# Altium PCB Low Power Brushed Motor Controller.PcbDoc
Units mil, origin at the board's own origin, x right, y up, seen from the top; angles counter-clockwise.
Board outline 1850 x 1300 mil, 2 copper layers (Top Layer, Bottom Layer); 31 components, 15 nets, 69 pads, 85 vias.
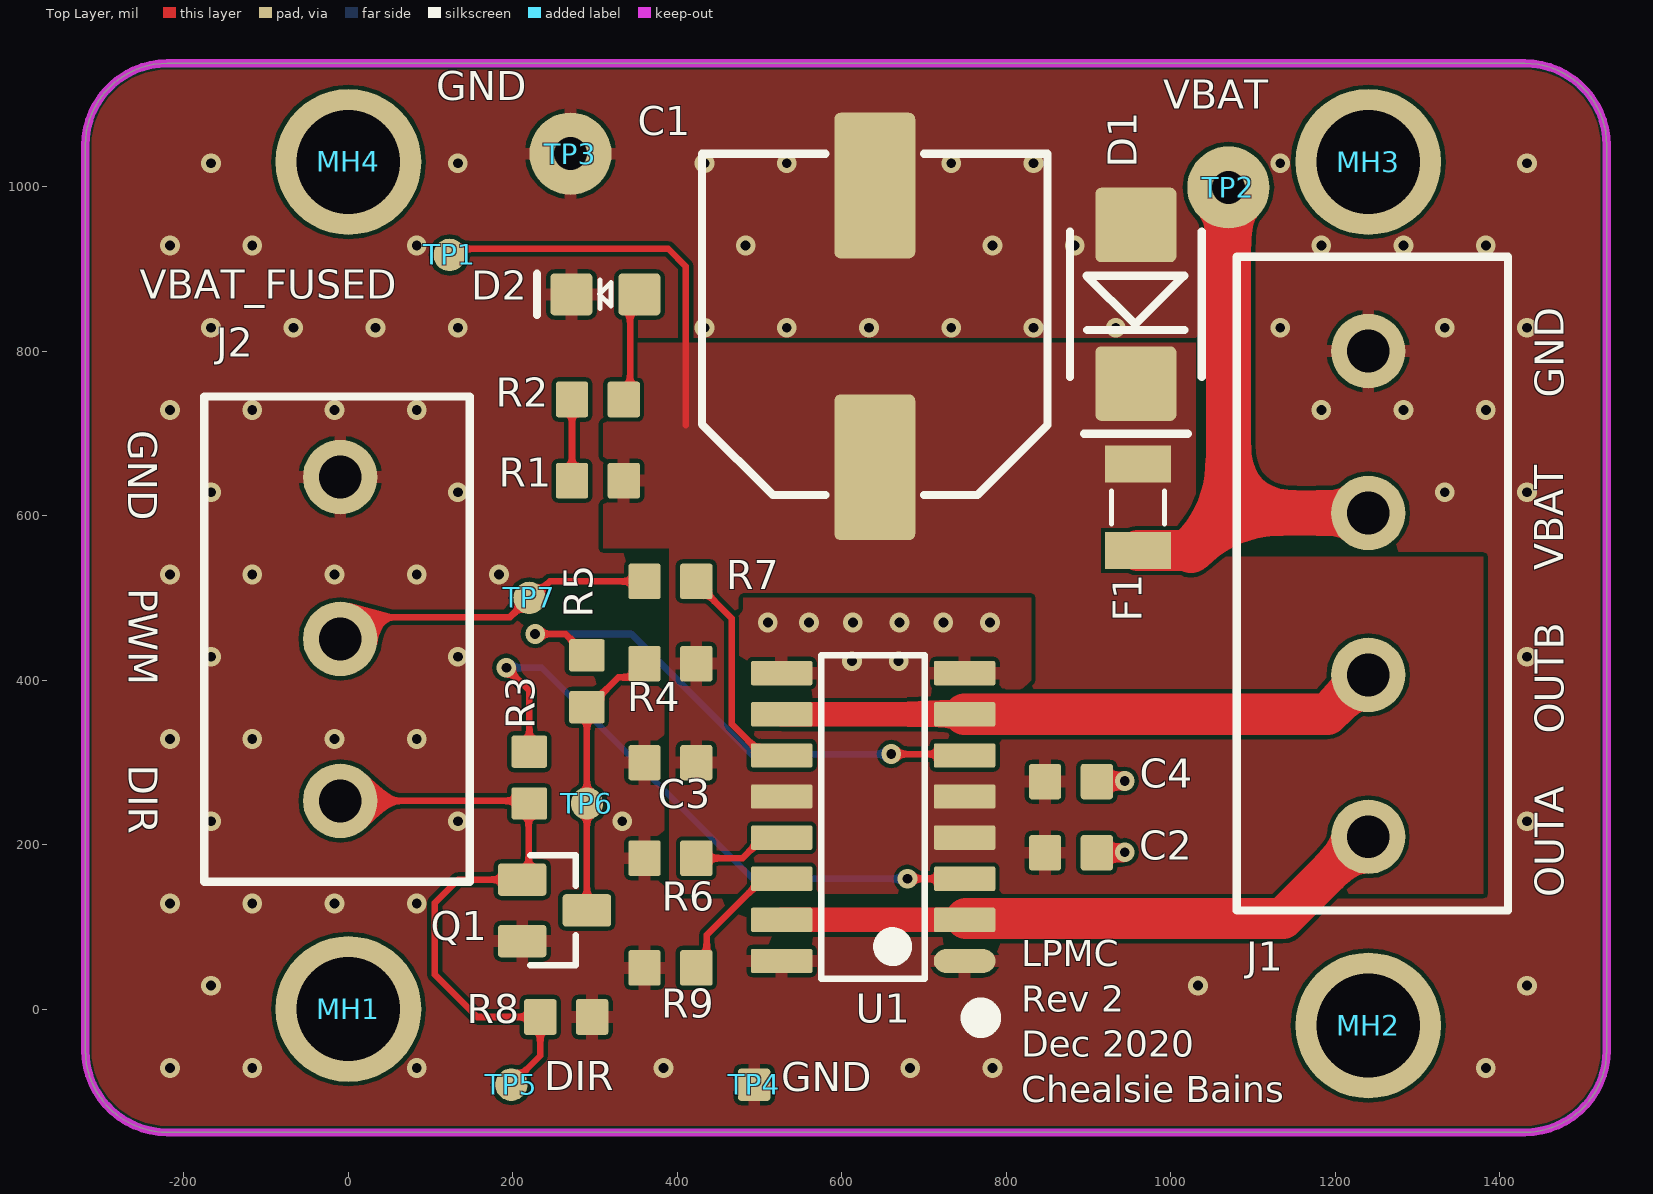
[diagram p0: Top Layer view]
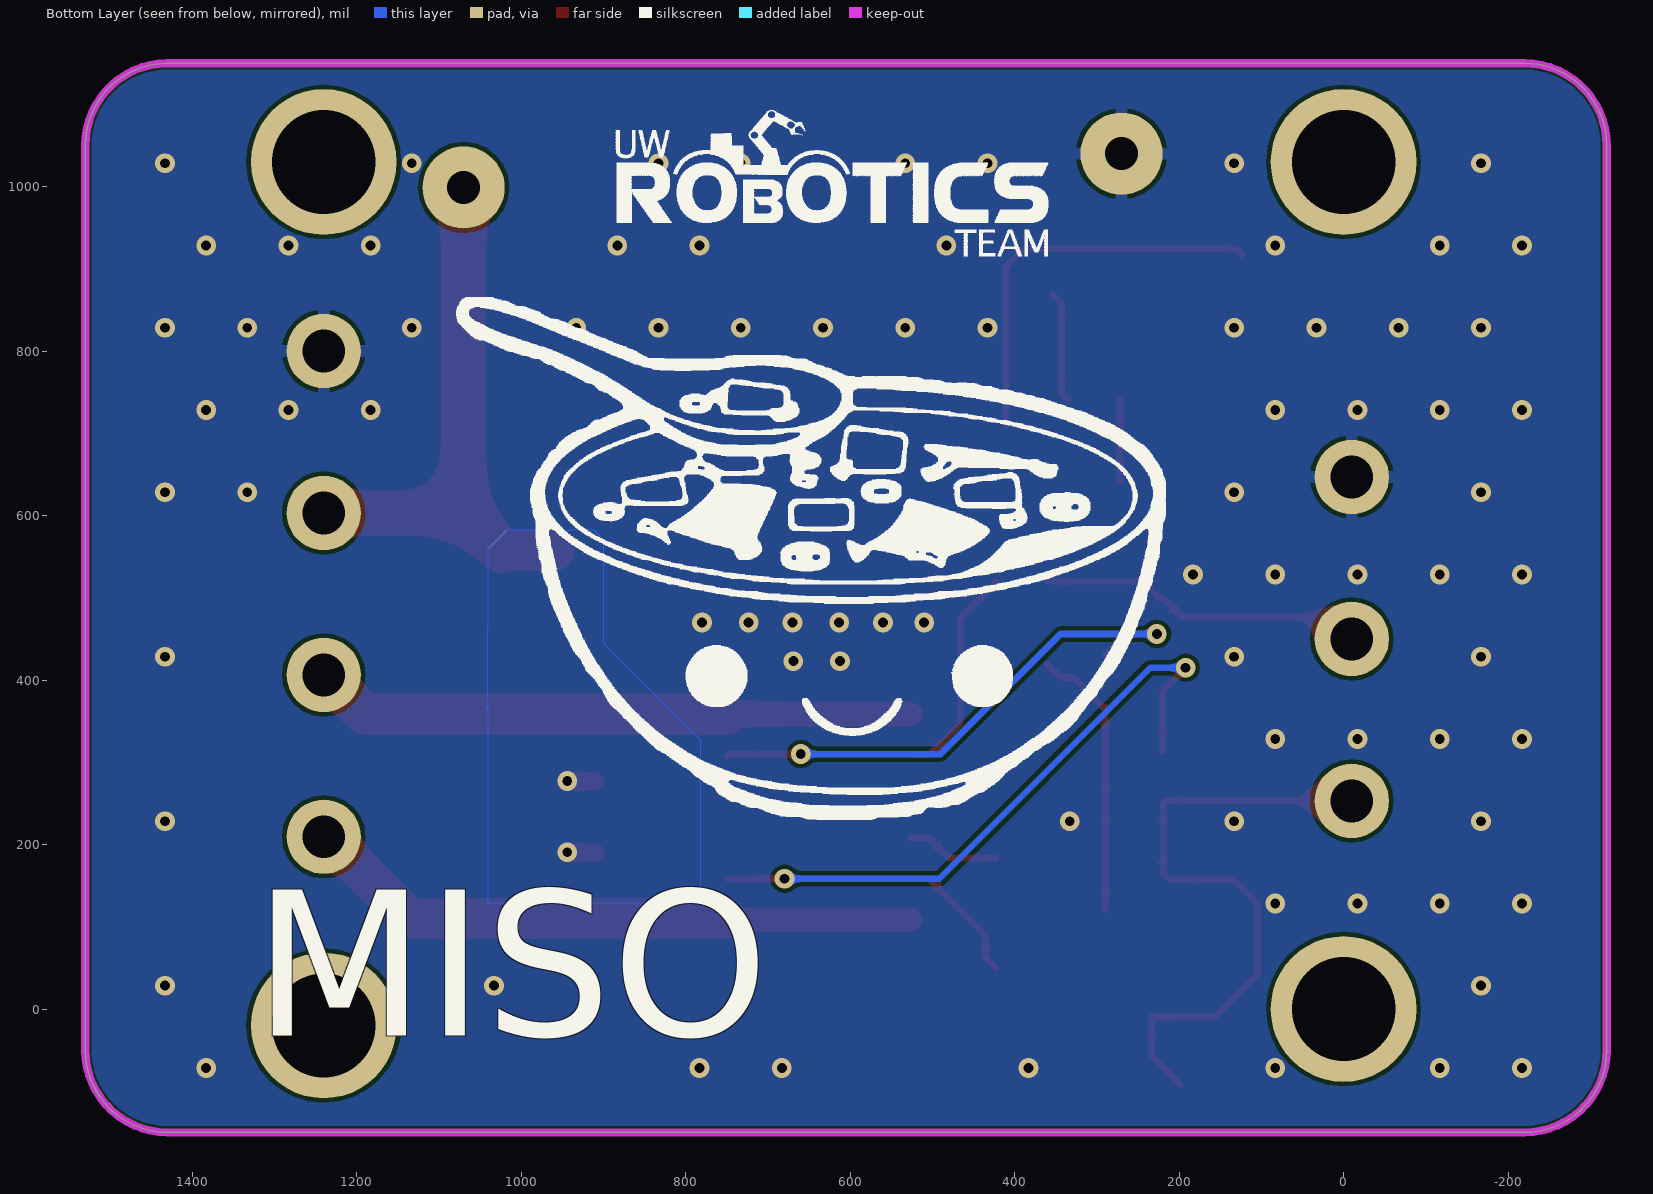
[diagram p1: Bottom Layer view, seen from below]
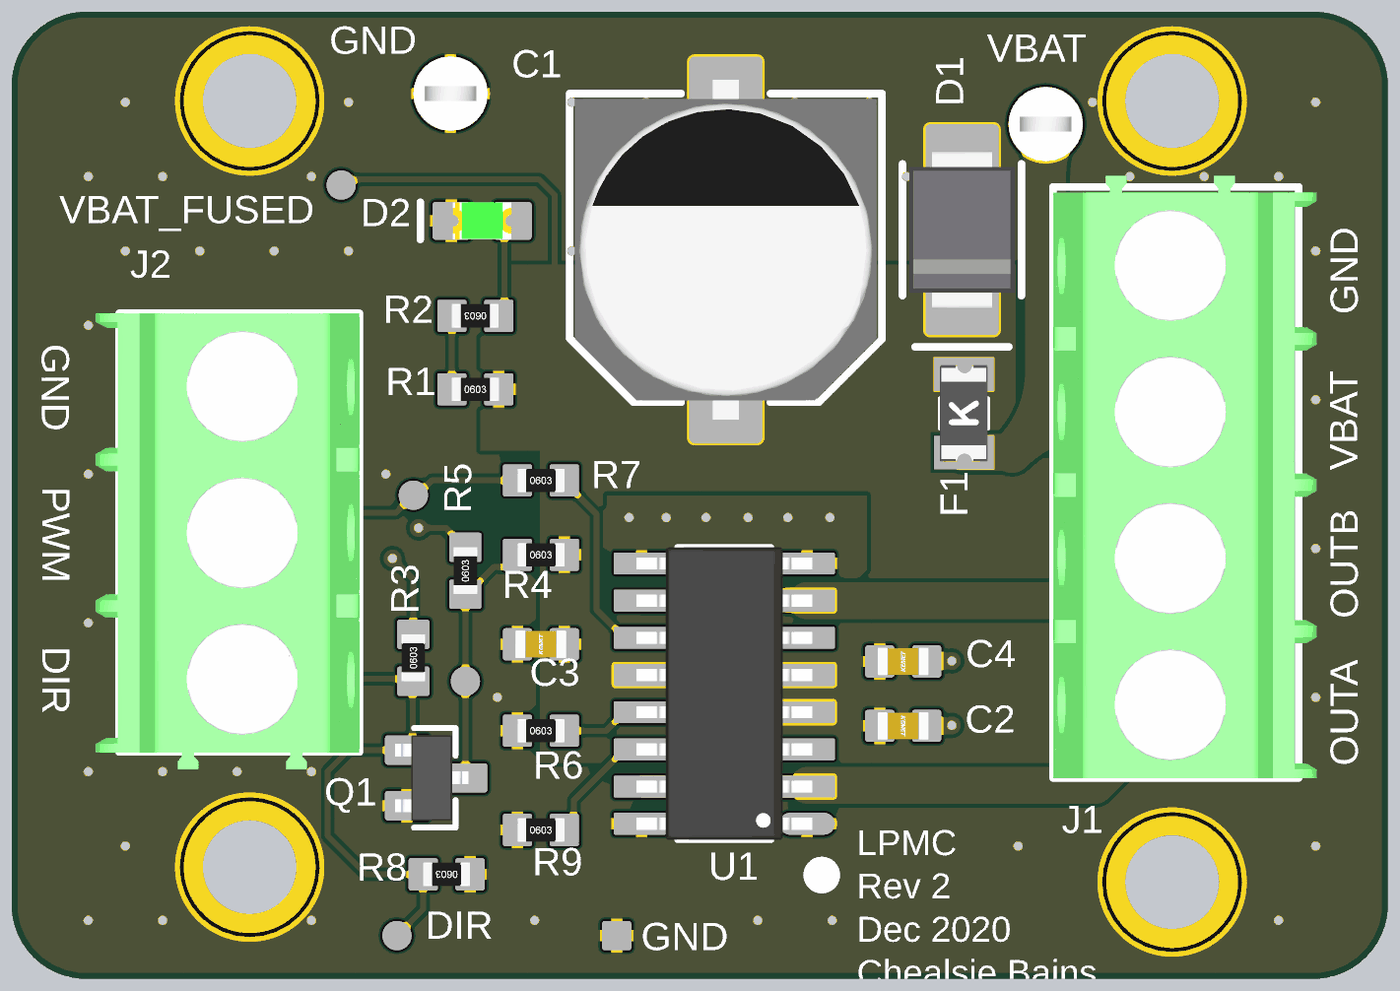
[diagram p2: 3D render of the assembled board from above, using the file's embedded part models]

## Layer stack, top to bottom
Top Solder: solder mask 0.4, Solder Resist, Dk 3.5
Top Layer: signal copper 1.4
Dielectric 1: dielectric 12.6, FR-4, Dk 4.8
Bottom Layer: signal copper 1.4
Bottom Solder: solder mask 0.4, Solder Resist, Dk 3.5

## Board outline
-320,-50 -320,1050 cw(c-220,1050) -220,1150 1430,1150 cw(c1430,1050) 1530,1050 1530,-50 cw(c1430,-50) 1430,-150 -220,-150 cw(c-220,-50)

## Design rules (kind name [scope] priority, off if disabled: settings)
BoardOutlineClearance [All] p1: gap=7.87 ignorepadtopadclearanceinfootprint=FALSE
Clearance [All] p1: gap=5 ignorepadtopadclearanceinfootprint=FALSE except(9.84: Arc-Hole Track-Hole SMDPad-Hole THPad-Hole Via-Hole Fill-Hole Poly-Hole Region-Hole Text-Hole)
ComponentClearance [All] p1: gap=5 collisioncheckmode=3 verticalgap=5 showdistances=TRUE
DiffPairsRouting [All] p1: maxlimit=10 minlimit=5 mostfreqgap=5 toplayer_minwidth=5 toplayer_maxwidth=1000 toplayer_prefwidth=5 bottomlayer_minwidth=5 bottomlayer_maxwidth=1000 bottomlayer_prefwidth=5 maxuncoupledlength=500
Height [All] p1: minheight=0 maxheight=71497.94 prefheight=500
HoleSize [All] p1: absolutevalues=TRUE maxlimit=248.03 minlimit=11.81 maxpercent=80.000 minpercent=20.000
HoleToHoleClearance [All] p1: gap=9.84 allowstackedmicrovias=FALSE
MinimumAnnularRing [All] p1: minimumring=3
MinimumSolderMaskSliver [All] p1: minsoldermaskwidth=0
PlaneClearance [All] p1: clearance=5
PlaneConnect PlaneConnectPowerPads [InPadClass('PowerPads')] p1: planeconnectstyle=Direct reliefexpansion=20 reliefentries=4 reliefconductorwidth=10 reliefairgap=10
PlaneConnect [All] p2: pad.planeconnectstyle=Relief pad.reliefexpansion=11.81 pad.reliefentries=4 pad.reliefconductorwidth=5 pad.reliefairgap=5 via.planeconnectstyle=Direct via.reliefexpansion=11.81 via.reliefentries=4 via.reliefconductorwidth=5 via.reliefairgap=5
PolygonConnect PolygonConnect_VBAT_FUSED [InComponent('U1')and InNet('VBAT_FUSED')or InComponent('F1') or InComponent('C1')or InComponent('D1')] p1: connectstyle=Direct reliefconductorwidth=10 reliefentries=4 polygonreliefangle="90 Angle" airgapwidth=10
PolygonConnect PolygonConnect_VIA [IsVia] p2: connectstyle=Direct reliefconductorwidth=10 reliefentries=4 polygonreliefangle="90 Angle" airgapwidth=10
PolygonConnect PolygonConnectPowerPads [All vs (InPadClass('PowerPads'))] p3: connectstyle=Direct reliefconductorwidth=10 reliefentries=4 polygonreliefangle="90 Angle" airgapwidth=10
PolygonConnect [All] p4: connectstyle=Relief reliefconductorwidth=15 reliefentries=4 polygonreliefangle="90 Angle" airgapwidth=5
RoutingVias [All] p1: holewidth=11.81 width=23.62 viastyle="Through Hole" minholewidth=11.81 minwidth=23.62 maxholewidth=23.62 maxwidth=259.84
SilkToSilkClearance [All] p1: silktosilkclearance=0
SilkToSolderMaskClearance [IsPad] p1: minsilkscreentomaskgap=5 clearancetoexposedcopper=TRUE
SolderMaskExpansion [All] p1: expansion=2.95 istentingtop=FALSE
Width "Width_HIGH CURRENT" [InNetClass('High Current')] p1: maxlimit=200 minlimit=50 preferedwidth=50 minimp=50.000000 maximp=50.000000 favimp=50.000000
Width [All] p2: maxlimit=1000 minlimit=5 preferedwidth=8 minimp=50.000000 maximp=50.000000 favimp=50.000000
20 further rules are at their usual default settings.

## Classes and differential pairs
net class "High Current": GND OUTA OUTB VBAT VBAT_FUSED

## Components (designator, comment, footprint, x,y, rotation, side; value= is the part's Value field where it differs from the comment)
C1 "CAP_270uF_50V_ALUM" RADIAL_PANASONIC_G 640,830 r0 top value=270μF
C2 "CAP_0.1uF_50V_0603" CAP0603 878.5,190 r180 top value=0.1μF
C3 "CAP_0.1uF_50V_0603" CAP0603 391.5,299.63 r0 top value=0.1μF
C4 "CAP_0.1uF_50V_0603" CAP0603 878.5,276.58 r0 top value=0.1μF
D1 "TVS_DIODE_UNIDIR_26V" TVS_DIODE_UNIDIRECTIONAL_SMB 957.5,856.96 r90 top
D2 "LG R971-KN-1" LED_0805_GREEN 312.4,868.94 r180 top
F1 "FUSE_5A_1206" FUSE_1206 960,610 r90 top
J1 "CON_4M_TERM" 1935187 1240,504.72 r270 top
J2 "CON_3M_TERM" 1935174 -10,450 r90 top
MH1 "MOUNTING_HOLE_M3" MOUNTING_HOLE_3mm 0,0 r0 top
MH2 "MOUNTING_HOLE_M3" MOUNTING_HOLE_3mm 1240,-20 r0 top
MH3 "MOUNTING_HOLE_M3" MOUNTING_HOLE_3mm 1240,1030 r0 top
MH4 "MOUNTING_HOLE_M3" MOUNTING_HOLE_3mm 0,1030 r0 top
Q1 "NMOS_30V_2.2A" NMOS_SSOT-3 250.63,120 r270 top
R1 "RES_1kΩ_0603" RESC0603 271.85,642.5 r0 top value=1kΩ
R2 "RES_1kΩ_0603" RESC0603 334.84,741.2 r180 top value=1kΩ
R3 "RES_1kΩ_0603" RESC0603 220,250 r90 top value=1kΩ
R4 "RES_1kΩ_0603" RESC0603 360,420 r0 top value=1kΩ
R5 "RES_1kΩ_0603" RESC0603 290,367.01 r90 top value=1kΩ
R6 "RES_1kΩ_0603" RESC0603 360,183.42 r0 top value=1kΩ
R7 "RES_1kΩ_0603" RESC0603 360,520 r0 top value=1kΩ
R8 "RES_1kΩ_0603" RESC0603 296.24,-9.63 r180 top value=1kΩ
R9 "RES_1kΩ_0603" RESC0603 360,50 r0 top value=1kΩ
TP1 "TESTPOINT_1MM_CIRCLE" TESTPOINT_CIRCLE_1MM 123,917 r0 top
TP2 "TESTPOINT_LOOP" TESTPOINT_LOOP 1070,999 r0 top
TP3 "TESTPOINT_LOOP" TESTPOINT_LOOP 270,1040 r0 top
TP4 "TESTPOINT_1MM_SQUARE" TESTPOINT_SQUARE_1MM 493.36,-92 r0 top
TP5 "TESTPOINT_1MM_CIRCLE" TESTPOINT_CIRCLE_1MM 198,-92 r0 top
TP6 "TESTPOINT_1MM_CIRCLE" TESTPOINT_CIRCLE_1MM 290,250 r0 top
TP7 "TESTPOINT_1MM_CIRCLE" TESTPOINT_CIRCLE_1MM 220,500 r0 top
U1 "IC_MOTOR_DRIVER_ST" SO-16N 637.99,233.42 r180 top

## Footprints (in the part's own frame and the unit in brackets; to place one, negate y for a bottom-side part, rotate by r counter-clockwise, add the part's x,y. Pads: shape width x height; smd on the part's side, far side on the other; paste and mask are expansions set on the pad)
1935174 [mm] "5 MM PITCH"
  round 2.3 hole 1.325: 1(-5,0) 2(0,0) 3(5,0)
  silkscreen extent -7.5,-4 7.48,4.2, body extent -8.08,-4 7.48,5, height 11.41
1935187 [mm]
  round 2.3 hole 1.325: 1(-7.5,0) 2(-2.5,0) 3(2.5,0) 4(7.5,0)
  silkscreen extent -10.41,-4.06 9.78,4.32, body extent -10.79,-4.06 9.78,4.94, height 11.41
CAP0603 [mm]
  rrect20% 1x1.1 smd: 1(-0.8,0) 2(0.8,0)
  body extent -0.87,-0.48 0.88,0.48, height 0.87
FUSE_1206 [mil]
  rect 45x80 smd mask+1: 1(-52.5,0) 2(52.5,0)
  silkscreen extent -20,-32 20,32, body extent -65,-32 65,32, height 32
LED_0805_GREEN [mm] "SMD, 2-Leads, Body 2x1.25mm"
  rrect20% 1.3x1.3 smd: 1(-1.05,0) 2(1.05,0)
  silkscreen extent -0.18,-0.63 2.11,0.64, body extent -1,-0.62 1,0.63, height 1.12
MOUNTING_HOLE_3mm [mm] "3mm Hole"
  round 4.5 hole 3.2 mask+0.3: 0(0,0)
NMOS_SSOT-3 [mm] "FDN337N"
  rrect20% 1x1.5 smd: 1(-0.95,-1) 2(0.95,-1) 3(0,1)
  silkscreen extent -1.7,-0.75 1.7,0.66, body extent -1.46,-1.41 1.46,1.1, height 1.12
RADIAL_PANASONIC_G [mm] "Size G radial surface mount capacitor"
  rrect15% 2.5x4.5 smd: 1(0,-4.35) 2(0,4.35)
  silkscreen extent -5.33,-5.21 5.33,5.33, body extent -5.15,-5.8 5.15,5.8, height 10.21
RESC0603 [mm] "Chip Resistor, Body 1.6x0.8mm, IPC Medium Density"
  rrect15% 1x1.1 smd: 1(0,0) 2(1.6,0)
  body extent 0,-0.4 1.6,0.4, height 0.46
SO-16N [mm]
  oval 1.9x0.75 smd: 1(-2.825,4.445)
  rrect15% 1.9x0.75 smd: 2(-2.825,3.175) 3(-2.825,1.905) 4(-2.825,0.635) 5(-2.825,-0.635) 6(-2.825,-1.905) 7(-2.825,-3.175) 8(-2.825,-4.445) 9(2.825,-4.445) 10(2.825,-3.175) 11(2.825,-1.905) 12(2.825,-0.635) 13(2.825,0.635) 14(2.825,1.905) 15(2.825,3.175) 16(2.825,4.445)
  silkscreen extent -3.45,-5 1.6,6.32, body extent -3,-5 3,5, height 1.75
TESTPOINT_CIRCLE_1MM [mm]
  round 1 smd: 1(0,0)
TESTPOINT_LOOP [mm]
  round 2.54 hole 1.02: 1(0,0)
  body extent -1.27,-1.27 1.27,1.27, height 4.57
TESTPOINT_SQUARE_1MM [mm]
  rrect20% 1x1 smd: 1(0,0)
TVS_DIODE_UNIDIRECTIONAL_SMB [mm] "SMBJ26A"
  rrect15% 2.3x2.5 smd: 1(-2.45,0) 2(2.45,0)
  silkscreen extent -4,-2.03 2.25,2.03, body extent -2.7,-1.8 2.7,1.8, height 2.27

## Part data
C1: "CAP ALUM 270uF 50VDC 20% SMD", Manufacturer 1="Panasonic Electronic Components", Manufacturer Part Number 1=EEE-FN1H271UP, Supplier Part Number 1=10-EEE-FN1H271UPCT-ND, Voltage Rating=50V, Mount="Surface Mount", Supplier 1=Digi-Key
C2 C3 C4: "CAP CER 0.1UF 50V X7R 0603", Case Code (Imperial)=0603, Case Code (Metric)=1608, Dielectric=X7R, Manufacturer 1=Yageo, Manufacturer Part Number 1=CC0603KRX7R9BB104, Package="0603 (1608 Metric)", Supplier Part Number 1=311-1344-1-ND, Voltage Rating=50V, Dimensions="0.063\" L x 0.031\" W (1.60mm x 0.80mm)", Mount="Surface Mount", Supplier 1=Digi-Key, Temperature Coefficient=X7R
D1: "TVS DIODE 26V 42.1V DO214AA", Clamping Voltage=42.1V, Manufacturer 1=Littelfuse, Manufacturer Part Number 1=SMBJ26A, Min Breakdown Voltage=28.9V, Package="DO-214AA, SMB", Reverse Standoff Voltage=26V, Supplier Part Number 1=SMBJ26ALFCT-ND, Mount="Surface Mount", Supplier 1=Digi-Key
D2: library part DIO_LED_G, "LED GREEN DIFFUSED 0805 SMD", Forward Voltage Drop=2.2V, Manufacturer 1=OSRAM, Package="0805 (2012 Metric)", Supplier Part Number 1=475-1410-1-ND, Manufacturer Part Number 1="LG R971-KN-1", Mount="Surface Mount", Supplier 1=Digi-Key
F1: "FUSE SMD 5A 63V", Case Code (Imperial)=1206, Case Code (Metric)=3216, Current=5A, DC Cold Resistance=31mR, Manufacturer 1=Littelfuse, Manufacturer Part Number 1=0466005.NRHF, Max Operating Temperature=90°C, Min Operating Temperature=-55°C, Power Dissipation=157.5mW, Supplier Part Number 1=F6019CT-ND, Voltage Rating (AC)=32V, Approvals=UL,CSA, Case/Package=1206, Current Rating=5A, Depth=1.52mm, Fuse Type="Board Mount (Cartridge Style Excluded)", Height=0.023inch, Housing Material=Ceramic, Length=3.18mm, Mount="Surface Mount", Supplier 1=Digi-Key, Voltage Rating (DC)=32V, Width=0.06inch
J1: "TERM BLK 4POS SIDE ENTRY 5MM PCB", Current=18A, Manufacturer 1="Phoenix Contact", Manufacturer Part Number 1=1935187, Supplier Part Number 1=277-1579-ND, Voltage=300V, Mounting Type="Through Hole", Pitch=5mm, Screw Thread=M2.6, Supplier 1=Digi-Key, Wire Gauge=12-26AWG, Wire Termination=Screw
J2: "TERM BLK 3POS SIDE ENTRY 5MM", Color=Green, Current=18A, Current Rating=17.5A, Flammability Rating="UL94 V-0", Manufacturer 1="Phoenix Contact", Manufacturer Part Number 1=1935174, Max Current Rating=16A, Max Supply Voltage=250V, Supplier Part Number 1=277-1578-ND, Voltage=300V, Voltage Rating (DC)=320V, Approvals=UL,VDE,CB, Category="Terminal Blocks", Contact Material=Copper,Tin, Depth=9mm, Height=11.3mm, Housing Color=Green, Housing Material=Polyamide, Insulation Material=Nylon, Length=9mm, Material=Nylon, Mount="Through Hole", Number of Circuits=3, Number of Contacts=3, Number of Levels=1, Number of Pins=3, Number of Poles=3, Number of Positions=3, Number of Positions Per Level=3, Number of Rows=1, Orientation=Straight, Pitch=5mm, REACH SVHC=Unknown, Stripping Length=5mm, Supplier 1=Digi-Key, Termination=Solder, Voltage Rating=250V, Weight=0.100531oz, Width=15mm, Wire Gauge (Max)=26AWG, Wire Gauge (Min)=12AWG, Wire/Cable Gauge=26AWG
Q1: "MOSFET N-CH 30V 2.2A SSOT3", Case/Package=TO-236-3, Continuous Drain Current (ID)=2.2A, Drain to Source Breakdown Voltage=30V, Drain to Source Resistance=65mR, Gate to Source Voltage (Vgs)=8V, Input Capacitance=300pF, Manufacturer="ON Semiconductor / Fairchild", Manufacturer Part Number=FDN337N, Max Operating Temperature=150°C, Max Power Dissipation=500mW, Supplier Part Number 1=FDN337NCT-ND, Threshold Voltage=700mV, Category=MOSFETs, Current Rating=2.2A, Drain to Source Voltage (Vdss)=30V, Dual Supply Voltage=30V, Element Configuration=Single, Fall Time=4ns, Mount="Surface Mount", Nominal Vgs=700mV, Number of Elements=1, On-State Resistance=65mR, Power Dissipation=500mW, Rds On Max=65mR, Rise Time=10ns, Supplier 1=Digi-Key, Turn-Off Delay Time=17ns, Turn-On Delay Time=4ns, Voltage Rating (DC)=30V
R1 R2 R3 R4 R5 R6 R7 R8 R9: library part RES_1kΩ_0603_5%, "RES 1K OHM 5% 1/10W 0603", Case Code (Imperial)=0603, Case Code (Metric)=1608, Manufacturer 1=Yageo, Manufacturer Part Number 1=RC0603JR-071KL, Package="0603 (1608 Metric)", Supplier Part Number 1=311-1.0KGRCT-ND, Tolerance=5%, Dimensions="0.063\" L x 0.031\" W (1.60mm x 0.80mm)", Mount="Surface Mount", Supplier 1=Digi-Key
TP1 TP5 TP6 TP7: "TESTPOINT 1MM CIRCLE"
TP2 TP3: "PC TEST POINT MINIATURE WHITE", Manufacturer 1="Keystone Electronics", Manufacturer Part Number 1=5002, Supplier Part Number 1=36-5002-ND, Mount="Through Hole", Supplier 1=Digi-Key
TP4: "TESTPOINT 1MM SQUARE"
U1: "IC H-BRIDGE MOTOR DRIVER 16-PINS STMicroelectronics VNH7070ASTR, SOIC", Case/Package=SOIC, Manufacturer 1=STMicroelectronics, Manufacturer Part Number 1=VNH7070ASTR, Max Operating Temperature=150°C, Min Operating Temperature=-40°C, Output Current=15A, Supplier Part Number 1=497-17630-1-ND, Interface=PWM, Logic Function=AND, Mount="Surface Mount", Number of Pins=16, Supplier 1=Digi-Key

## Via types
v1: diameter 24, hole 12, Top Layer to Bottom Layer, tented both sides, 85 vias

## Nets (pads, with @x,y where several pads share a name; then routed paths per layer and width w, separated by ;. In a path a pad name is that pad's centre, name@x,y a point inside that pad or via, vN(x,y) a via of type N, cw(c..) or ccw(c..) an arc to the next point about the centre after c; other vN are vias at no path point)
DIR: J2.1 Q1.1 R3.1 R8.2 TP5.1 | length 781.1
  Top Layer w8: J2.1 216.85,253.15 R3.1 219.07,249.07 219.07,165.22 Q1.1 133.4,157.4 105,129 105,42 156.63,-9.63 R8.2 233.25,-56.75 TP5.1 TP5.1@199.97,-92
DIR_INVERTED: Q1.3 R4.1 R5.1 TP6.1 | length 339.5
  Top Layer w8: Q1.3 TP6.1 R5.1 291.97,367.01 328.31,403.35 344.31,403.35 360,419.04 R4.1
GND: C1.2 C2.1 C3.1 C4.2 D1.2 D2.2 J1.1 J2.3 Q1.2 R6.1 R8.1 R9.1 TP3.1 TP4.1 U1.1 U1.8 U1.9 U1.16 | length 70
  Top Layer w8: C4.2 C4.2@912.5,279.08
  Top Layer w22.5: C2.1 v1@943.22,190 ; C4.2@910.66,277.23 v1(943.87,277.23)
  other v1: -217.01,-71.58 -117.01,-71.58 82.99,-71.58 382.99,-71.58 682.99,-71.58 782.99,-71.58 1382.99,-71.58 -167.01,28.42 1032.99,28.42 1432.99,28.42 -217.01,128.42 -117.01,128.42 -17.01,128.42 82.99,128.42 943.87,190.66 -167.01,228.42 132.99,228.42 332.99,228.42 1432.99,228.42 -217.01,328.42 -117.01,328.42 -17.01,328.42 82.99,328.42 612.37,423 669,423 -167.01,428.42 132.99,428.42 1432.99,428.42 510,470 560,470 613.37,470 670,470 723.37,470 780,470 -217.01,528.42 -117.01,528.42 -17.01,528.42 82.99,528.42 182.99,528.42 -167.01,628.42 132.99,628.42 1332.99,628.42 1432.99,628.42 -217.01,728.42 -117.01,728.42 -17.01,728.42 82.99,728.42 1182.99,728.42 1282.99,728.42 1382.99,728.42 -167.01,828.42 -67.01,828.42 32.99,828.42 132.99,828.42 432.99,828.42 532.99,828.42 632.99,828.42 732.99,828.42 832.99,828.42 932.99,828.42 1132.99,828.42 1332.99,828.42 1432.99,828.42 -217.01,928.42 -117.01,928.42 82.99,928.42 482.99,928.42 782.99,928.42 882.99,928.42 1182.99,928.42 1282.99,928.42 1382.99,928.42 -167.01,1028.42 132.99,1028.42 432.99,1028.42 532.99,1028.42 732.99,1028.42 832.99,1028.42 1132.99,1028.42 1432.99,1028.42
NetD2_1: D2.1 R2.1 | length 135.6
  Top Layer w8: R2.1 342.42,748.78 342.42,857.62 D2.1
NetR1_1: R1.1 R2.2 | length 98.7
  Top Layer w8: R1.1 R2.2
NetR3_2: R3.2 U1.3 | length 777.1
  Top Layer w8: v1(192,415) 220,387 R3.2 ; v1(679.69,158.42) U1.3
  Bottom Layer w8: v1(192,415) 235,415 491.58,158.42 v1(679.69,158.42)
NetR5_2: R5.2 U1.6 | length 657.1
  Top Layer w8: v1(227,456) 264,456 R5.2 ; v1(660,310) 747.64,310 U1.6
  Bottom Layer w8: v1(227,456) 344,456 490,310 v1(660,310)
NetR6_2: R6.2 U1.13 | length 114.1
  Top Layer w8: R6.2 479.13,183.42 504.13,208.42 U1.13
NetR7_2: R7.2 U1.11 | length 267.8
  Top Layer w8: R7.2 422.99,518.03 466.02,475 466.02,346.53 504.13,308.42 U1.11
NetR9_2: R9.2 U1.14 | length 164.7
  Top Layer w8: R9.2 435.72,62.73 435.72,90.01 504.13,158.42 U1.14
OUTA: J1.4 U1.2 U1.15 | length 752.8
  Top Layer w30: U1.15 U1.2
  Top Layer w50: U1.2@750.79,110 1136,110 1235.45,209.45 J1.4
OUTB: J1.3 U1.7 U1.10 | length 733.1
  Top Layer w30: U1.10 U1.7
  Top Layer w50: U1.7 1190.44,358.42 1238.31,406.3 J1.3
PWM: J2.2 R7.1 TP7.1 | length 379.9
  Top Layer w8: J2.2@-1.89,476.61 196.61,476.61 TP7.1 224.81,500 244.81,520 R7.1
VBAT: F1.1 J1.2 TP2.1 | length 694.8
  Top Layer w50: F1.1 1024.35,557.5
  Top Layer w55: 1024.35,557.5 1070,603.15 ; TP2.1 1070,603.15 ; J1.2 1070,603.15
VBAT_FUSED: C1.1 C2.2 C3.2 C4.1 D1.1 F1.2 R1.2 R4.2 TP1.1 U1.4 U1.5 U1.12 | length 492.2
  Top Layer w8: TP1.1 130.53,924.53 388.76,924.53 390,923.29 410,903.29 410,710
pads on no net: MH1.0 MH2.0 MH3.0 MH4.0

## Polygon pours and split planes (outlines as drawn)
GND on Top Layer "L1 - GND" (solid, remove dead copper, pour order 19): -317.79,-154.03 -322.39,1145.99 1527.66,1152.54 1532.26,-147.48
VBAT_FUSED on Top Layer "L1 - VBAT_FUSED 2" (solid, remove dead copper, pour order 17): 1380,430 1380,140 390.13,140 390,560 310,560 310,810 1030,810 1030,576.32 1056.32,550 1380,550
GND on Top Layer "L1 - GND2" (solid, remove dead copper, pour order 16): 480,500 480,390 820,390 830,400 830,500
GND on Bottom Layer "L2 - GND" (solid, remove dead copper, pour order 18): -317.79,-154.03 -322.39,1145.99 1527.66,1152.54 1532.26,-147.48
VBAT_FUSED on Bottom Layer "L2 - VBAT_FUSED" (solid, remove dead copper, pour order 15): 899.53,569.96 910.24,581.97 1017.64,581.97 1040.59,559.02 1041.24,366.43 1042.24,365.43 1040.59,365.43 1040.59,129.21 781.42,129.21 781.42,326.67 820.17,365.43 899.53,444.78

## Keep-outs
Keep-Out Layer:
  lines w10: -320,-50 ccw(c-220,-50) -220,-150 1430,-150 ccw(c1430,-50) 1530,-50 1530,1050 ccw(c1430,1050) 1430,1150 -220,1150 ccw(c-220,1050) -320,1050 -320,110 -320,-50

## Silkscreen, mask and mechanical layers (free items; w line width, h text height)
Top Overlay:
  text "GND" at 107,1093.64 h60
  text "VBAT" at 991.03,1083 h60
  text "VBAT_FUSED" at -254,852 h60
  text "GND" at 1489.36,743.27 h60 r90
  text "GND" at -279.36,703.58 h60 r270
  text "VBAT" at 1488.7,533.71 h60 r90
  text "PWM" at -278.7,511.49 h60 r270
  text "OUTB" at 1489.36,334.52 h60 r90
  text "DIR" at -278.7,296.91 h60 r270
  text "OUTA" at 1489.36,136.22 h60 r90
  text "DIR" at 238,-110 h60
  text "GND" at 526,-111.36 h60
  text "LPMC / Rev 2 / Dec 2020 / Chealsie Bains" at 818,-124 h55
Bottom Overlay:
  drawing of 29 lines, arcs and shapes, not listed
  text "MISO" at 1325.53,-109 h400
Mechanical 15:
  lines w10: -322.05,1149.82 1535.98,1156.39 1540.61,-153.59 -317.42,-160.17 -322.05,1149.82